# Altium PCB BMSPowerDistribution.PcbDoc (part 5 of 6)
Units mil, origin at the board's own origin, x right, y up, seen from the top; angles counter-clockwise.
Board outline 5328.74 x 5315 mil, 4 copper layers (Top Layer, Layer 1, Layer 2, Bottom Layer), stack 24.6 mil thick; 321 components, 209 nets, 1075 pads, 489 vias.
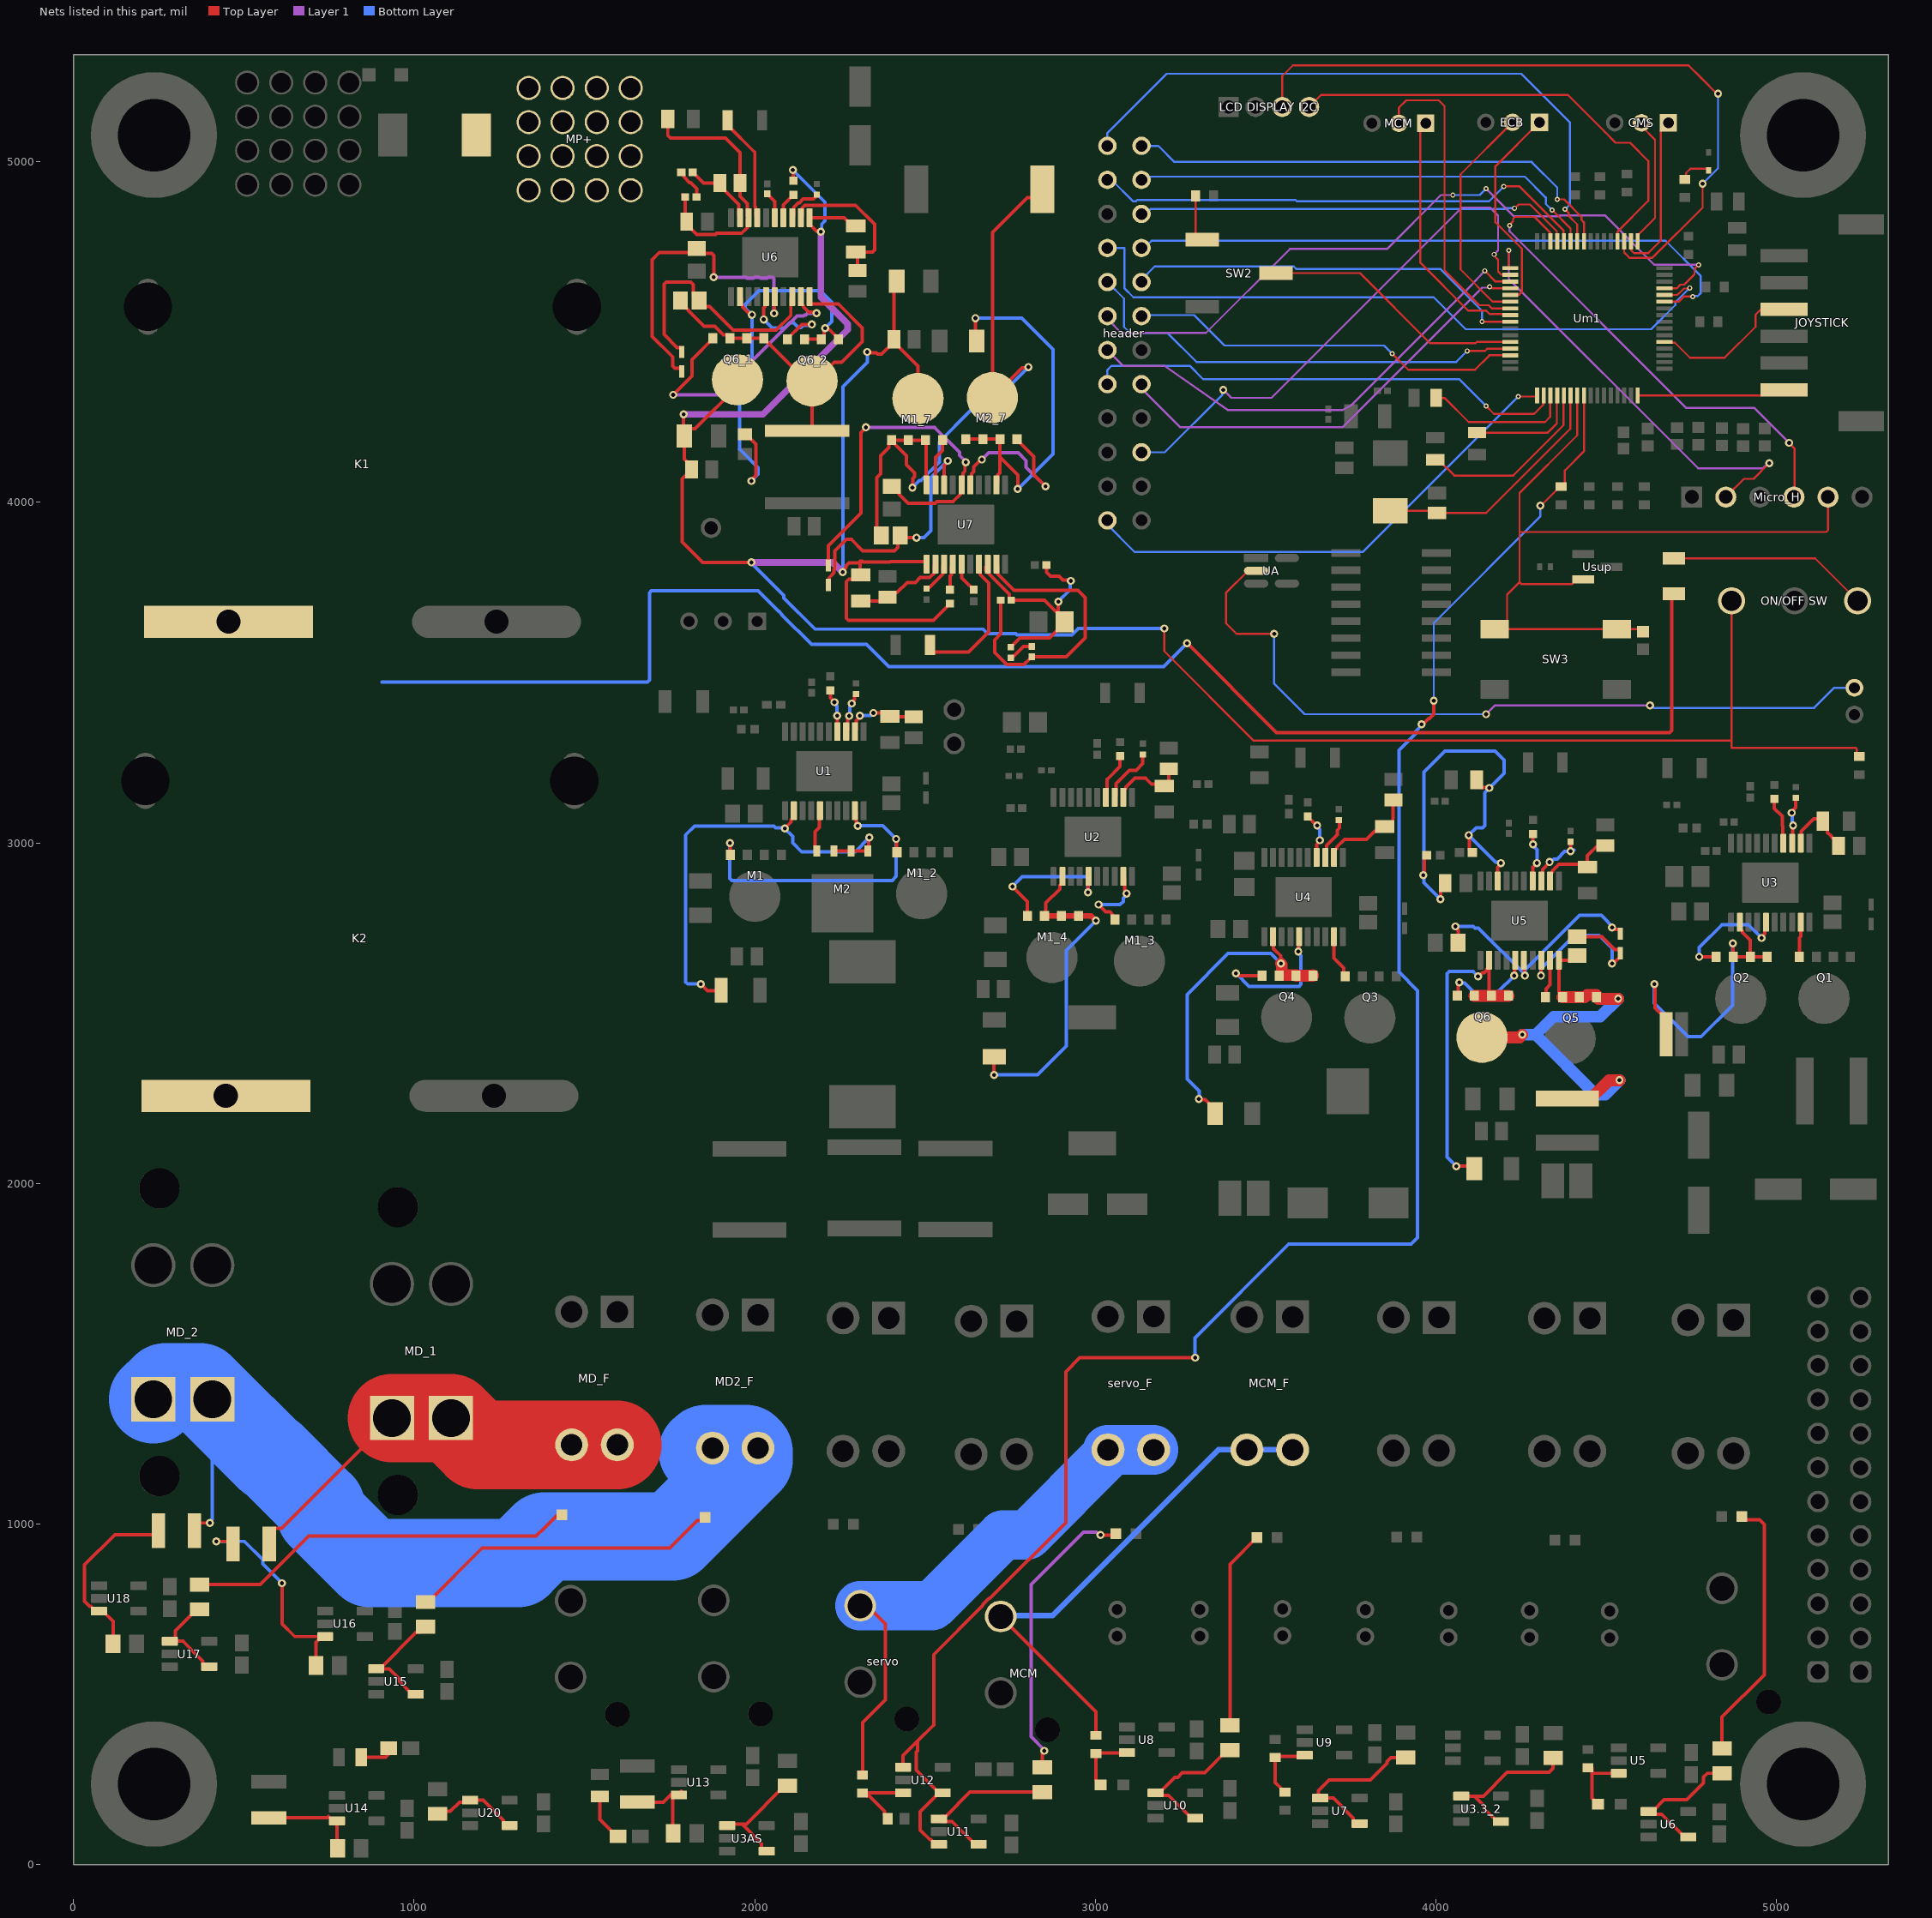
[diagram p6: the nets of this part, all layers, seen from the top]

## Via types
v1: diameter 23.62, hole 11.81, Top Layer to Bottom Layer, 370 vias
v2: diameter 19.68, hole 7.87, Top Layer to Bottom Layer, 84 vias
v3: diameter 15, hole 8, Top Layer to Bottom Layer, 35 vias

## Nets (pads, with @x,y where several pads share a name; then routed paths per layer and width w, separated by ;. In a path a pad name is that pad's centre, name@x,y a point inside that pad or via, vN(x,y) a via of type N, cw(c..) or ccw(c..) an arc to the next point about the centre after c; other vN are vias at no path point) (continued)
NetC83_1: C83.1 R56.1 R58.1 R59.2 U5.8 | length 1348.3
  Top Layer w10: v1(3963.4,2905) 3966.01,2907.61 3966.01,2959.06 R56.1@3970.47,2963.52 ; v1(4013.78,2834.65) 4013.86,2834.72 4013.86,2868.19 R58.1@4027.56,2881.89 ; v1(4096.39,3022.83) 4099,3020.22 4099,2980.68 4107.24,2972.44 C83.1@4107.42,2972.44 ; R59.2@4120.25,3185.04 4120.25,3176.54 4134.25,3162.54 4156.43,3162.54 v1(4157.55,3161.42) ; U5.8@4182.13,2888.01 4182.13,2928.79 4190.94,2937.61 v1(4190.94,2940.94)
  Bottom Layer w10: v1@3962.72,2905 3965.32,2907.61 3965.32,2931.29 3965.74,2931.71 3965.74,3208.02 4027.4,3269.68 4174.21,3269.68 4200.79,3243.11 4200.79,3204.66 v1(4157.55,3161.42) 4143.7,3147.57 4143.7,3051.18 4137.28,3044.76 4118.32,3044.76 v1(4096.39,3022.83) 4175.67,2943.55 4188.34,2943.55 v1(4190.94,2940.94) ; v1(3963.4,2905) 3965.32,2903.08 3965.32,2883.1 v1(4013.78,2834.65)
NetC84_2: C84.2 D5.2 U5.16 | length 759.4
  Top Layer w10: v1(4058.07,2754.92) 4058.07,2751.24 4065.5,2743.81 C84.2@4065.5,2706.5 ; U5.16@4258.9,2655.72 4260.35,2654.27 4260.35,2611.69 v1(4261.81,2610.24) ; v1(4517.72,2751.97) 4521.4,2751.97 4527.17,2746.2 4538.65,2746.2 4541.34,2743.51 D5.2@4541.34,2733.27
  Bottom Layer w10: v1(4058.07,2754.92) 4110.54,2754.92 4115.32,2750.15 4125.32,2750.15 v1@4261.81,2613.65 ; v1(4261.81,2610.24) v1@4261.81,2613.65 ; v1@4524.28,2749.09 4485.97,2787.4 4422.24,2787.4 4262.4,2627.56 4262.4,2614.24 v1@4261.81,2613.65
NetC85_1: C85.1 L1_5.1 Q5.1 Q5.2 Q5.3 Q6.5-6-7-8 U5.20 | length 1300.4
  Top Layer w10: Q5.3@4372.05,2547.24 4372.05,2548.72 4361.26,2559.51 U5.20@4361.26,2655.72 4401.79,2655.72 C85.1@4415.35,2669.29 ; L1_5.1@4386.16,2249.65 L1_5.1@4387.78,2248.03
  Top Layer w34.65: Q6.5-6-7-8@4135.63,2429.04 4245.97,2429.04 v1(4253.94,2437.01) ; Q5.3@4372.05,2547.24 Q5.2@4422.05,2547.24 4437.28,2547.24 4444.04,2554 Q5.1@4472.05,2554 ; L1_5.1@4387.78,2248.03 4453.83,2248.03 4508.94,2303.15 v1(4539.37,2303.15) ; Q5.1@4472.05,2547.24 4476.97,2542.32 v1(4535.43,2542.32)
  Bottom Layer w34.65: v1(4253.94,2437.01) 4293.31,2437.01 ; v1(4535.43,2542.32) 4482.78,2489.67 4345.96,2489.67 4293.31,2437.01 ; v1(4539.37,2303.15) 4497.62,2261.4 4468.92,2261.4 4293.31,2437.01
NetC85_2: C85.2 D5.1 U5.18 | length 580.8
  Top Layer w10: v1(4309.06,2610.24) 4309.57,2610.75 4309.57,2655.21 U5.18@4310.08,2655.72 ; C85.2@4415.35,2724.41 4487.99,2724.41 4525.36,2687.04 4538.65,2687.04 4543.67,2682.01 D5.1@4543.67,2668.72 ; v1(4517.72,2645.67) 4517.72,2652.56 4527.96,2652.56 4541.34,2665.94 D5.1@4541.34,2676.18
  Bottom Layer w10: v1(4309.06,2610.24) 4309.06,2629.92 4407.48,2728.35 4479.51,2728.35 4517.72,2690.14 v1(4517.72,2645.67)
NetCb71_1: Cb71.1 L1_7.2 M1_7.1 M1_7.2 M1_7.3 M2_7.5-6-7-8 U7.20 | length 2066.9
  Top Layer w10: Cb71.1@2372.05,3902.56 2358.75,3915.86 2358.75,4073.32 2369.64,4084.21 2369.64,4137.51 2393.77,4161.64 2393.77,4175.08 M1_7.1@2401.68,4182.99 ; v1(2463.24,4043.22) 2464.49,4044.47 2464.49,4070.03 2469.49,4075.03 2469.49,4086.36 2445.5,4110.35 2445.5,4137.69 2401.68,4181.51 M1_7.1@2401.68,4182.99 ; U7.20@2505.23,4051.18 2503.46,4052.95 2503.46,4181.22 M1_7.3@2501.68,4182.99 M1_7.2@2451.68,4182.99 M1_7.1@2401.68,4182.99 ; v1(2804.06,4397.64) 2801.45,4395.03 2785.32,4395.03 M2_7.5-6-7-8@2698.2,4307.91 2698.2,4793.16 2800.31,4895.27 2820.42,4895.27 L1_7.2@2844.45,4919.29
  Bottom Layer w10: v1(2463.24,4043.22) 2483.63,4063.62 2487.83,4063.62 2542.28,4118.07 2542.28,4178.11 2633.13,4268.96 2692.19,4268.96 2746.82,4323.59 2746.82,4340.4 v1(2804.06,4397.64)
NetCb71_2: Cb71.2 D7.1 U7.18 | length 739.9
  Top Layer w10: D7.1@2216.44,3757.59 2219.13,3760.28 2219.13,3779.01 2233.13,3793.01 2233.13,3803.18 2235.76,3805.8 2235.76,3858.05 2269.42,3891.72 2283.86,3891.72 2317.31,3858.27 2410.41,3858.27 2420.44,3868.3 Cb71.2@2420.44,3879.05 ; Cb71.2@2427.17,3907.48 2438.11,3896.54 v1(2475.23,3896.54) ; U7.18@2556.41,4051.18 2556.93,4051.69 2556.93,4108.32 2566.96,4118.36 v1(2566.96,4122.05)
  Bottom Layer w10: v1(2475.23,3896.54) 2496.93,3896.54 2517.73,3917.34 2517.73,4072.82 v1(2566.96,4122.05)
NetCb_1: Cb.1 L6.1 Q6_1.1 Q6_1.2 Q6_1.3 Q6_2.5-6-7-8 U6.20 | length 1082
  Top Layer w10: Cb.1@1781.88,4593.13 1781.88,4588.21 1806.35,4563.75 1806.35,4562.83 1851.66,4517.51 1882.74,4517.51 1908.21,4492.04 1918.91,4492.04 1927.2,4483.75 Q6_1.3@1927.2,4482.28 Q6_1.2@1977.2,4482.28 Q6_1.1@2027.2,4482.28 2027.2,4480.8 2150.87,4357.13 Q6_2.5-6-7-8@2168.44,4357.13 ; L6.1@2154.44,4209.73 2155.72,4209.73 2168.44,4222.45 Q6_2.5-6-7-8@2168.44,4357.13 ; U6.20@2161.35,4604.08 2161.35,4587.33 2165.21,4583.47 2245.27,4583.47 2316.1,4512.64 2316.1,4471.61 2255.91,4411.42 2233.45,4411.42 2179.16,4357.13 Q6_2.5-6-7-8@2168.44,4357.13
NetCb_2: Cb.2 D6.1 U6.18 | length 751
  Top Layer w10: D6.1@1785.43,4441.93 1785.43,4452.17 1782.74,4454.87 1772.5,4454.87 1734.37,4493 1734.37,4640.87 1740.22,4646.73 1812.84,4646.73 1820.35,4639.23 1820.35,4609.79 Cb.2@1837,4593.13 1837,4592.43 1853.65,4575.78 1867.8,4575.78 1937.53,4506.04 1993.04,4506.04 1993.34,4505.75 2009.89,4505.75 2010.18,4506.04 2063.13,4506.04 2106.31,4549.23 2106.31,4600.22 U6.18@2110.17,4604.08
NetCbp2_1: Cbp2.1 RJ7.2 | length 87.6
  Top Layer w10: RJ7.2@844.49,314.96 915.35,314.96 Cbp2.1@927.17,326.77
NetCbp_1: Cbp.1 RJ6.2 | length 142.3
  Top Layer w10: RJ6.2@1545.28,199.8 1545.28,132.01 1594.6,82.68 Cbp.1@1599.39,82.68
NetCc6_1: Cc6.1 Rc.1 Rf.1 Rfb.2 U6.8 | length 803.4
  Top Layer w10: Rfb.2@1744.98,5125.98 1744.98,5078.24 1753.34,5069.88 1914.37,5069.88 1957.04,5027.21 Cc6.1@1957.04,4937.85 1957.04,4898.51 1978.36,4877.19 1978.36,4840.22 U6.8@1982.22,4836.37 1978.36,4832.51 1978.36,4807.18 1961.53,4790.34 1887.92,4790.34 1884.79,4787.22 1830.25,4787.22 1800.49,4816.98 Rf.1@1800.49,4824.85 1796.05,4829.3 Rc.1@1796.05,4896.85 1795.06,4896.85 1789.24,4902.68 Rc.1@1789.24,4903.67
NetCc6_2: Cc6.2 Cc_6.2 U6.9 | length 218.3
  Top Layer w10: Cc_6.2@1818.26,4968.85 1819.1,4968.85 1850.1,4937.85 Cc6.2@1897.98,4937.85 1897.98,4929.98 1952.77,4875.19 1952.77,4840.22 U6.9@1956.63,4836.37
NetCc7_1: Cc7.1 Cc72.2 U7.9 | length 908.5
  Top Layer w10: U7.9@2709.96,3818.89 2713.81,3815.04 2713.81,3789.7 2761.47,3742.05 2948.9,3742.05 2970.47,3720.47 2970.47,3602.36 2915.26,3547.15 Cc72.2@2813.97,3547.15 2813.97,3546.31 2809.67,3542.01 2808.82,3542.01 2790.66,3523.84 2740.1,3523.84 2704.44,3559.51 2704.44,3596.17 2722.64,3614.37 Cc7.1@2722.64,3712.4
NetCc7_2: Cc7.2 Rb7.2 Rc7.1 Rf7.2 U7.8 | length 727
  Top Layer w10: U7.8@2678.7,3811.02 2678.7,3799.23 2747.52,3730.41 2747.52,3717.83 2752.76,3712.6 Cc7.2@2753.54,3712.6 2851.38,3712.6 2875.18,3688.8 2910.43,3653.54 Rb7.2@2910.43,3649.61 2910.43,3645.67 2866.36,3601.6 2778.76,3601.6 Rc7.1@2751.97,3574.89 Rc7.1@2751.97,3574.89 ; Rf7.2@2856.3,3816.46 2857.14,3815.61 2857.14,3794.44 2868.11,3783.46 2893.7,3783.46 2904.87,3772.29 2925.54,3772.29 v1(2928.15,3769.68) ; Rb7.2@2891.73,3668.31 v1(2891.73,3708.66)
  Bottom Layer w10: v1(2891.73,3708.66) 2925.94,3742.87 2925.94,3767.48 v1(2928.15,3769.68)
NetCc72_1: Cc72.1 Rc7.2 | length 76
  Top Layer w10: Rc7.2@2751.97,3543.22 2756.18,3547.44 2760.15,3547.44 2789.67,3576.96 Cc72.1@2813.97,3576.96
NetCc_6_1: Cc_6.1 Rc.2 | length 92.9
  Top Layer w10: Cc_6.1@1784.51,4968.85 1785.36,4968.85 1791.62,4962.59 1791.62,4956.46 1809.09,4938.99 1812.04,4938.99 1829.51,4921.52 Rc.2@1829.51,4896.85
NetCi6_1: "ON/OFF SW.1" Ci6.1 Ci7.1 Cx6.1 Cx7.1 M1_7.5-6-7-8 Q6_1.5-6-7-8 Re7.1 Ren.1 RSW.2 RU1.1 Ru7.1 U6.1@2161.35,4836.37 U7.1@2505.23,3818.89 | length 8408.3
  Top Layer w6: v1(3202.76,3629.92) 3202.76,3562.99 3465.55,3300.2 4868.68,3300.2 ; 4868.68,3710.98 4868.68,3300.2 ; RSW.2@5236.3,3249.53 5236.3,3276.01 5232.78,3279.53 4868.68,3279.53 4868.68,3300.2
  Top Layer w10: v1(1791.34,4258.86) 1791.34,4197.01 Ci6.1@1793.21,4195.13 1793.21,4126.71 1814.91,4105.01 Cx6.1@1814.91,4097.13 1786.95,4069.17 1786.95,3884.31 1847.36,3823.9 v1(1990.16,3823.9) ; Ci6.1@1793.21,4198.42 1810.94,4216.15 1825.08,4216.15 1949.44,4340.5 Q6_1.5-6-7-8@1949.44,4360.13 ; v1(2112.2,4976.38) 2112.86,4975.72 2112.86,4945.18 Ren.1@2113.51,4944.52 ; v1(2194.37,4794.76) 2191.76,4797.37 2181.65,4797.37 2161.35,4817.67 U6.1@2161.35,4836.37 2263.04,4836.37 2287.4,4812.01 RU1.1@2297.24,4812.01 ; v1(2258.86,3795.28) 2258.86,3798.96 2267.9,3808 2267.9,3813.75 2276.63,3822.49 2298.71,3822.49 2299.06,3822.83 2309.06,3822.83 2309.06,3789.9 Ru7.1@2311.44,3787.52 2298.19,3774.27 2276.24,3774.27 2269.69,3767.72 2269.69,3659.4 2275.54,3653.54 2524.38,3653.54 Re7.1@2573.72,3702.89 ; 2309.06,3827.74 2315.71,3827.74 2318.89,3824.56 2396.5,3824.56 2398.72,3826.77 2501.37,3826.77 2505.23,3822.91 U7.1@2505.23,3818.89 ; v1(2330.71,4441.93) 2333.32,4439.32 2357,4439.32 2360.85,4435.47 2373.13,4435.47 Cx7.1@2408.91,4471.26 ; Cx7.1@2408.03,4472.15 Cx7.1@2408.91,4471.26 ; Ci7.1@2408.91,4625.98 Cx7.1@2408.91,4479.13 Cx7.1@2408.91,4471.26 ; M1_7.5-6-7-8@2479.44,4305.13 2479.44,4400.73 Cx7.1@2408.91,4471.26
  Layer 1 w19.68: v1(1791.34,4258.86) 2024.61,4258.86 2273.34,4507.59 2273.34,4523.9 2194.37,4602.87 v1(2194.37,4794.76) ; v1(1990.16,3823.9) 2229.17,3823.9 2257.79,3795.28 v1(2258.86,3795.28)
  Bottom Layer w10: v1(1990.16,3823.9) 1990.16,3822.83 2085.95,3727.04 2085.95,3719.17 2177.17,3627.95 2671.26,3627.95 2683.98,3615.24 2766.15,3615.24 2770.24,3611.14 2931.28,3611.14 2950.05,3629.92 v1(3202.76,3629.92) ; v1(2112.2,4976.38) 2206.69,4881.89 2206.69,4826.57 2196.98,4816.86 2196.98,4797.37 v1(2194.37,4794.76) ; v1(2258.86,3795.28) 2258.86,4339.57 2330.71,4411.42 v1(2330.71,4441.93)
NetCr7_1: Cr7.1 U7.5@2607.59,3818.89 | length 90.2
  Top Layer w10: U7.5@2607.59,3818.89 2607.59,3778.89 2621.47,3765.02 2622.31,3765.02 2642.72,3744.61 Cr7.1@2642.72,3743.76
NetCr_1: Cr.1 U6.5@2058.99,4836.37 | length 78.5
  Top Layer w10: Cr.1@2037.51,4905.95 2037.51,4905.11 2058.99,4883.63 U6.5@2058.99,4836.37
NetCs7_2: Cs7.2 U7.7 | length 421.7
  Top Layer w10: Cs7.2@2515.07,3581.69 2515.07,3571.02 2525.07,3561.02 2627.95,3561.02 2687.01,3620.08 2687.01,3763.78 2662.63,3788.15 2662.63,3815.04 U7.7@2658.77,3818.89
NetCs_2: Cs.2 U6.7 | length 321.7
  Top Layer w10: Cs.2@1920.96,5122.05 1920.96,5107.55 2000.51,5027.99 2000.51,4869 2002.14,4867.37 2002.14,4864.78 2003.95,4862.97 2003.95,4840.22 U6.7@2007.81,4836.37
NetCv7_2: Cv7.2 D7.2 U7.16 | length 1125.3
  Top Layer w10: D7.2@2216.44,3814.68 2216.44,3872.53 2312.01,3968.1 2312.01,4205.71 v1(2326.77,4220.47) ; Cv7.2@2400.44,4031.47 2422.83,4031.47 2424.06,4030.24 2424.06,4024.39 2450.42,3998.03 2529.96,3998.03 2535.02,4003.09 2582.43,4003.09 2603.74,4024.39 2603.74,4047.32 2611.45,4055.04 2611.45,4085.8 2617.47,4091.82 2617.47,4115.5 v1(2620.08,4118.11)
  Layer 1 w10: v1(2326.77,4220.47) 2528.12,4220.47 2601.86,4146.73 2601.86,4137.81 2620.08,4119.59 v1(2620.08,4118.11)
NetCv_2: Cv.2 D6.2 U6.16 | length 977.1
  Top Layer w10: D6.2@1785.43,4384.84 1785.43,4391.02 1782.74,4393.72 1766.12,4393.72 1759.64,4400.2 1759.64,4427.37 1699.44,4487.57 1699.44,4713.13 1719.84,4733.54 1817.5,4733.54 Cv.2@1830.44,4746.47 1845.44,4731.47 1874.06,4731.47 1879.92,4725.61 v1(1879.92,4661.42) ; v1(2057.09,4555.12) 2058.04,4556.07 2058.04,4603.13 U6.16@2058.99,4604.08
  Layer 1 w10: v1(1879.92,4661.42) 1974.45,4661.42 1977.73,4658.14 1996.55,4658.14 1999.83,4661.42 2013.82,4661.42 2017.1,4658.14 2035.92,4658.14 2039.2,4661.42 2053.19,4661.42 2057.09,4657.52 v1(2057.09,4555.12)
NetD11_2: D11.2 R10.2 | length 93.6
  Top Layer w6: R10.2@4726.38,4948.82 4735.05,4957.5 4735.05,4967.34 4748.03,4980.31 D11.2@4801.18,4980.31
NetFans_L_2: F_L.2 RL3.2 | length 785.2
  Top Layer w10: RL3.2@4840.55,340.55 4840.55,433.07 4964.57,557.09 4964.57,999.02 4950.79,1012.8 4907.48,1012.8 F_L.2@4898.62,1021.65
NetLabel30: header.1 Um1.41 | length 1473.8
  Top Layer w6: v3(4356.62,4890.07) 4376.5,4890.07 4427.79,4838.79 4427.79,4829.91 4435.19,4822.52 Um1.41@4435.19,4766.76
  Bottom Layer w6: header.1@3135.83,5047.24 3185.43,5047.24 3232.68,5000 4281.5,5000 4356.62,4924.88 v3(4356.62,4890.07)
NetLabel31: header.2 Um1.42 | length 1898.5
  Top Layer w6: v3(4379.08,4861.51) 4379.08,4861.2 4390.6,4849.69 4390.6,4845.44 4390.78,4845.26 4390.78,4841.08 4415.5,4816.35 Um1.42@4415.5,4766.76
  Bottom Layer w6: header.2@3035.83,5047.24 3035.83,5085.04 3209.79,5259 4251.19,5259 4393.65,5116.54 4393.65,4874.52 4380.65,4861.51 v3(4379.08,4861.51)
NetLabel32: header.3 Um1.43 | length 1375.8
  Top Layer w6: v3(4341.54,4858.27) 4342.31,4858.27 4395.82,4804.75 Um1.43@4395.82,4766.76
  Bottom Layer w6: header.3@3135.83,4947.24 3148.82,4947.24 3158,4956.43 3163.08,4956.43 3163.34,4956.69 4261.81,4956.69 4323.08,4895.42 4323.08,4876.72 v3(4341.54,4858.27)
NetLabel36: header.7 Um1.27 | length 1861.2
  Top Layer w6: Um1.27@4671.41,4589.59 4712.75,4589.59 4727.81,4604.65 v3(4754.25,4604.65)
  Bottom Layer w6: header.7@3135.83,4747.24 3143.92,4747.24 3165.33,4768.65 4674.85,4768.65 4777.56,4665.94 4777.56,4614.17 4769.76,4606.37 4755.97,4606.37 v3(4754.25,4604.65)
NetLabel37: header.8 Um1.28 | length 2016.3
  Top Layer w6: Um1.28@4671.41,4609.28 4708.62,4609.28 4713.08,4613.74 4714.19,4613.74 4728.65,4628.2 4744.34,4628.2 v3(4746.06,4629.92)
  Bottom Layer w6: header.8@3035.83,4747.24 3085.43,4747.24 3086.09,4746.59 3086.09,4628.48 3112.2,4602.36 3994.09,4602.36 4087.83,4508.62 4632.64,4508.62 4703.8,4579.78 4703.8,4587.65 v3(4746.06,4629.92)
NetLabel38: header.9 Um1.57 | length 1183.2
  Top Layer w6: v3(4135.83,4531.5) 4136.31,4531.02 4218.17,4531.02 Um1.57@4218.65,4530.54
  Bottom Layer w6: header.9@3136.89,4655.04 3174.76,4692.91 3583,4692.91 3590.12,4685.79 4013.03,4685.79 4135.83,4562.99 v3(4135.83,4531.5)
NetLabel40: header.10 Um1.61 | length 1358.8
  Top Layer w6: v3(4092.52,4444.88) 4144.72,4444.88 4151.64,4451.8 Um1.61@4218.65,4451.8
  Bottom Layer w6: header.10@3021.65,4665.35 header.10@3035.83,4665.35 ; header.10@3035.83,4647.24 3084.65,4598.43 3084.65,4515.75 3102.73,4497.67 3212.3,4497.67 3297.32,4412.64 4060.28,4412.64 v3(4092.52,4444.88)
NetLabel41: header.11 Um1.62 | length 1166.5
  Top Layer w6: v3(3872.05,4437.01) 3919.29,4389.76 4115.21,4389.76 4157.55,4432.11 Um1.62@4218.65,4432.11
  Bottom Layer w6: header.11@3136.07,4550.1 3290.45,4550.1 3379.92,4460.63 3848.43,4460.63 v3(3872.05,4437.01)
NetLabel42: header.12 Um1.29 | length 2170.4
  Top Layer w6: Um1.29@4671.41,4628.96 4707.79,4628.96 4718.48,4639.65 4729.8,4639.65 4759.66,4669.51 4759.66,4685.84 v3(4771.65,4697.83)
  Layer 1 w6: header.12@3035.83,4547.24 3035.83,4538.79 3076.95,4497.66 3155.22,4497.66 3155.27,4497.71 3325.07,4497.71 3571.76,4744.41 3856.61,4744.41 4014.76,4902.56 v3(4050.2,4902.56) ; v3(4147.64,4921.26) 4148,4921.26 4229.37,4839.89 4361.45,4839.89 4364.69,4843.14 4496.77,4843.14 4642.07,4697.83 v3(4771.65,4697.83)
  Bottom Layer w6: v3(4050.2,4902.56) 4128.94,4902.56 v3(4147.64,4921.26)
NetLabel44: header.14 Um1.51 | length 1423.9
  Top Layer w6: v3(4143.7,4680.35) 4175.41,4648.65 Um1.51@4218.65,4648.65
  Layer 1 w6: header.14@3035.83,4447.24 3081.74,4401.33 3201.18,4401.33 3203.07,4401.33 3388.5,4271.65 3726.94,4271.65 3752.57,4286.04 4098.62,4632.08 v3(4143.7,4680.35)
NetLabel45: header.15 Um1.52 | length 1315.6
  Top Layer w6: v3(4158.27,4633.43) 4161.96,4633.43 4166.43,4628.96 Um1.52@4218.65,4628.96
  Layer 1 w6: header.15@3135.83,4347.24 3135.83,4334.65 3250,4220.47 3726.38,4220.47 4136.73,4630.83 4155.67,4630.83 v3(4158.27,4633.43)
NetLabel46: header.16 Um1.2 | length 1424.1
  Top Layer w6: v3(4147.64,4283.46) 4171.26,4259.84 4288.38,4259.84 4316.08,4287.54 4316.08,4313 Um1.2@4317.08,4314
  Bottom Layer w6: header.16@3035.83,4347.24 3035.83,4388.98 3048.18,4401.33 3277.8,4401.33 3317.57,4361.56 4069.54,4361.56 v3(4147.64,4283.46)
NetLabel47: RJ3.2 Um1.3 | length 433.5
  Top Layer w6: RJ3.2@4001.04,4307 4025.84,4307 4096.62,4236.22 4320.87,4236.22 4335.76,4251.12 4335.76,4313 Um1.3@4336.76,4314
NetLabel48: RJ4.2 Um1.4 | length 327.8
  Top Layer w6: RJ4.2@4121.56,4204.96 4328.98,4204.96 4355.45,4231.43 4355.45,4313 Um1.4@4356.45,4314
NetLabel60: header.24 Um1.1 | length 1495.3
  Top Layer w6: v3(4242.13,4311.02) 4296.39,4311.02 4297.39,4312.02 Um1.1@4297.39,4314
  Bottom Layer w6: header.24@3029.53,3940.94 3116.14,3854.33 3785.43,3854.33 v3(4242.13,4311.02)
NetLabel61: MCM.2@3891.56,5113.33 Um1.55 | length 913.4
  Top Layer w6: MCM.2@3891.56,5118 3891.56,5159.22 3913.34,5181 4008.56,5181 4025.56,5164 4025.56,4681 4127.5,4579.06 4155.14,4579.06 4164.29,4569.91 Um1.55@4218.65,4569.91
NetLabel62: MCM.1@3970.3,5113.33 Um1.56 | length 743.5
  Top Layer w6: MCM.1@3970.3,5113.33 3954.72,5097.76 3954.72,4703.83 4095.57,4562.99 4148.49,4562.99 4158.64,4552.84 4194.3,4552.84 4195.92,4551.22 4217.65,4551.22 Um1.56@4218.65,4550.22
NetLabel63: CMS.2 Um1.33 | length 385.7
  Top Layer w6: Um1.33@4592.67,4766.76 4592.67,4784.26 4643.7,4835.29 4643.7,5065.27 4604.3,5104.67 CMS.2@4604.3,5115
NetLabel64: CMS.1 Um1.34 | length 487.5
  Top Layer w6: Um1.34@4572.98,4766.76 4573.98,4765.76 4573.98,4740.3 4582.09,4732.19 4623.92,4732.19 4660.76,4769.03 4660.76,5092.72 CMS.1@4683.04,5115
NetLabel65: ECB.1 Um1.53 | length 622.1
  Top Layer w6: Um1.53@4218.65,4609.28 4219.65,4610.28 4245.11,4610.28 4253.22,4618.38 4253.22,4744.81 4175.2,4822.83 4175.2,4987.24 ECB.1@4304.3,5116.35
NetLabel66: ECB.2 Um1.54 | length 680.5
  Top Layer w6: Um1.54@4218.65,4589.59 4167.33,4589.59 4072.83,4684.08 4072.83,4963.62 ECB.2@4225.56,5116.35
NetLabel72: header.4 Um1.44 | length 1472.4
  Top Layer w6: v3(4199.8,4928.15) 4245.67,4928.15 4374.56,4799.26 4374.56,4768.33 Um1.44@4376.13,4766.76
  Bottom Layer w6: header.4@3035.83,4947.24 3048.08,4947.24 3110.48,4884.84 3119.42,4884.84 3122.84,4888.27 3588.28,4888.27 3592.37,4884.19 4155.84,4884.19 v3(4199.8,4928.15)
NetLabel73: header.5 Um1.45 | length 1293.9
  Top Layer w6: v3(4231.3,4864.17) 4232.91,4864.17 4243.77,4875.03 4276.66,4875.03 4355.45,4796.25 4355.45,4767.76 Um1.45@4356.45,4766.76
  Bottom Layer w6: header.5@3135.83,4847.24 3148.38,4847.24 3163.34,4862.2 4192.16,4862.2 4204.04,4861.64 4206.67,4861.64 4209.2,4864.17 v3(4231.3,4864.17)
NetLabel74: header.19 Um1.50 | length 1594.9
  Top Layer w6: v3(4171.26,4728.35) 4171.26,4724.66 4183.03,4712.89 4183.03,4678.49 4192.19,4669.33 4217.65,4669.33 Um1.50@4218.65,4668.33
  Layer 1 w6: v1(3375.98,4330.71) 3399.61,4307.09 3517.72,4307.09 4076.77,4866.14 4159.45,4866.14 4183.07,4842.52 4183.07,4740.16 v3(4171.26,4728.35)
  Bottom Layer w6: header.19@3135.83,4147.24 3204.33,4147.24 3373.17,4316.09 3373.17,4327.9 v1(3375.98,4330.71)
"NetLCD DISPLAY I2C_3": "LCD DISPLAY I2C.3" Um1.35 | length 2099.2
  Top Layer w6: 3549.21,5161.42 3549.21,5251.97 3580.71,5283.46 4742.22,5283.46 4779.58,5246.11 4779.58,5246.02 v1@4828.74,5196.85 ; Um1.35@4553.3,4766.76 4553.3,4734.3 4564.91,4722.69 4564.91,4722.2 4568.42,4718.68 4636.4,4718.68 4783.46,4865.75 v1(4783.46,4936.02)
  Bottom Layer w6: v1(4783.46,4936.02) 4828.74,4981.3 v1@4828.74,5196.85
  other v1: 4828.74,5200.54
"NetLCD DISPLAY I2C_4": "LCD DISPLAY I2C.4" Um1.36 | length 1364.9
  Top Layer w6: 3627.95,5161.42 3663.6,5197.06 4387.58,5197.06 4495.85,5088.79 4495.85,5088.68 4528.38,5056.15 4570.82,5056.15 4624.02,5002.95 4624.02,4885.83 4533.93,4795.74 4533.93,4767.07 Um1.36@4533.61,4766.76
NetM1_2_4: M1.4 M1_2.4 U1.19 | length 962.6
  Top Layer w10: v1(1927.17,3000) 1927.82,2999.34 1927.82,2965.8 M1.4@1928.48,2965.14 ; U1.19@2294.28,3094.86 2298.14,3091 2298.14,3058.34 2302.46,3054.02 v1(2302.46,3050.33) ; v1(2415.35,3011.81) 2416.64,3010.53 2416.64,2973.82 M1_2.4@2417.92,2972.54
  Bottom Layer w10: v1(1927.17,3000) 1927.17,2895.62 1933.02,2889.76 2403.54,2889.76 2415.35,2901.57 v1(2415.35,3011.81) 2376.83,3050.33 v1(2302.46,3050.33)
NetM1_3_4: M1_3.4 U2.19 | length 213.3
  Top Layer w10: v1(3009.84,2818.9) 3031.48,2797.26 3043.49,2797.26 3051.77,2788.97 M1_3.4@3051.77,2787.5 ; U2.19@3082.72,2901.72 3086.57,2897.86 3086.57,2860.55 3091.9,2855.22 v1(3091.9,2851.54)
  Bottom Layer w10: v1(3009.84,2818.9) 3072.83,2818.9 3082.22,2828.29 3082.22,2838.17 3091.9,2847.85 v1(3091.9,2851.54)
NetM1_4_1: M1_4.1 M1_4.2 M1_4.3 R17.1 U2.12 | length 999.5
  Top Layer w10: v1(2702.76,2318.9) 2702.76,2370.67 R17.1@2703.72,2371.63 ; M1_4.3@2850.98,2785.53 2855.14,2789.68 2855.14,2823.64 2895.85,2864.35 2895.85,2875.28 2903.58,2883.02 U2.12@2903.58,2901.72
  Top Layer w16.14: M1_4.3@2850.98,2785.53 M1_4.2@2900.98,2785.53 2988.09,2785.53 v1(3001.97,2771.65)
  Bottom Layer w10: v1(2702.76,2318.9) 2830.76,2318.9 2915.06,2403.2 2915.06,2684.74 v1(3001.97,2771.65)
NetM1_4_4: M1_4.4 U2.15 | length 428.7
  Top Layer w10: v1(2756.89,2872.05) 2800.98,2827.95 M1_4.4@2800.98,2785.53 ; v1(2978.66,2854.85) 2979.51,2855.69 2979.51,2900.87 U2.15@2980.35,2901.72
  Bottom Layer w10: v1(2756.89,2872.05) 2785.71,2900.87 2972.81,2900.87 2978.66,2895.01 v1(2978.66,2854.85)
NetM1_7_4: M1_7.4 U7.19 | length 140.5
  Top Layer w10: U7.19@2530.82,4051.18 2530.82,4131.75 2551.68,4152.6 M1_7.4@2551.68,4182.99
NetM2_1: M2.1 M2.2 M2.3 R6.2 U1.12 | length 1363
  Top Layer w10: v1(1842.14,2585.73) 1861.56,2566.31 1901.04,2566.31 R6.2@1901.66,2566.93 ; v1(2088.58,3042.32) 2088.58,3042.57 2107.42,3061.4 2107.42,3068.43 2115.15,3076.16 U1.12@2115.15,3094.86 ; M2.3@2231.59,2977.66 M2.3@2232.87,2976.38 M2.2@2282.87,2976.38 M2.1@2332.87,2976.38 2334.74,2978.25 2334.74,3013.88 v1(2336.61,3015.75)
  Bottom Layer w10: v1(1842.14,2585.73) 1803.1,2585.73 1797.24,2591.59 1797.24,3023.62 1823.47,3049.85 2056.77,3049.85 2061.77,3044.85 2086.06,3044.85 2111.54,3019.37 2111.54,3000.67 2137.8,2974.41 2295.28,2974.41 v1(2336.61,3015.75)
NetM2_4: M2.4 U1.15 | length 126.4
  Top Layer w10: M2.4@2182.87,2976.38 2177.83,2981.42 2177.83,3033.63 2189.46,3045.26 2189.46,3092.4 U1.15@2191.92,3094.86
NetM2_7_1: M2_7.1 M2_7.2 M2_7.3 Rs7.1 U7.12 | length 1140.9
  Top Layer w10: M2_7.1@2620.44,4185.77 M2_7.2@2670.44,4185.77 M2_7.3@2720.44,4185.77 2720.44,4145.67 2720.44,4132.91 ; v1(2648.44,4541.13) 2648.44,4477.32 Rs7.1@2651.62,4474.13 ; U7.12@2709.96,4051.18 2713.81,4055.04 2713.81,4080.37 2720.44,4086.99 2720.44,4132.91 ; v1(2772.64,4039.37) 2772.64,4080.71 2720.44,4132.91
  Bottom Layer w10: v1(2648.44,4541.13) 2784.52,4541.13 2875.98,4449.67 2875.98,4142.72 v1(2772.64,4039.37)
NetM2_7_4: M2_7.4 U7.15 | length 510.6
  Top Layer w10: U7.15@2633.18,4051.18 2637,4054.99 2637,4083.85 2643.7,4090.55 2643.7,4104.71 2664.98,4125.98 v1(2667.32,4125.98) ; M2_7.4@2770.44,4185.77 2770.44,4184.29 2819.88,4134.85 2819.88,4081.69 v1(2854.33,4047.24)
  Layer 1 w10: v1(2667.32,4125.98) 2687.01,4145.67 2773.87,4145.67 2796.87,4122.67 2796.87,4103.72 2853.35,4047.24 v1(2854.33,4047.24)
NetMCM_1: MCM.1@2722.44,728.35 MCM_F.2 R20.1 | length 1525
  Top Layer w10: MCM.1@2722.44,728.35 3001.97,448.82 R20.1@3001.97,379
  Bottom Layer w16.14: MCM.1@2722.44,728.35 2724.64,730.55 2874.48,730.55 3361.65,1217.72 MCM_F.2@3445.79,1217.72 MCM_F.2@3579.65,1217.72
NetMCM_L_2: MCM_L.2 RL4.2 | length 589
  Top Layer w10: RL4.2@3395.67,408.46 3395.67,881.89 MCM_L.2@3477.36,963.58
NetMD2_F_2: MD2_F.2 MD_2.11 MD_2.12 RM3.1 | length 2829.8
  Top Layer w10: RM3.1@352.39,1009.48 358.92,1002.95 v1(400.59,1002.95)
  Bottom Layer w10: MD_2.12@248.34,1363.87 248.34,1352.36 294.21,1306.48 305.72,1306.48 336.61,1275.59 ; v1(400.59,1002.95) 400.59,1006.64 407.48,1013.53 MD_2.11@407.48,1366.14
  Bottom Layer w259.84: MD_2.12@234.25,1366.14 269.69,1401.57 372.05,1401.57 MD_2.11@407.48,1366.14 577.93,1195.69 582.3,1195.69 726.11,1051.89 726.11,1029.24 869.91,885.43 1305.39,885.43 1382.99,963.04 1759.3,963.04 1982.28,1186.02 1982.28,1212.6 1974.41,1220.47 1856.3,1220.47 MD2_F.2@1848.43,1212.6
NetMD_1_11: MD_1.11 MD_1.12 MD_F.2 RM.1 | length 1226
  Top Layer w10: RM.1@574.83,940.94 574.83,972.47 589.61,987.25 611.26,987.25 MD_1.12@935.04,1311.02
  Top Layer w259.84: MD_1.12@935.04,1311.02 MD_1.11@1108.27,1311.02 1187.01,1232.28 MD_F.2@1462.6,1232.28 MD_F.2@1596.46,1232.28
NetMD_L_2: MD2_L.2 RL9.2 | length 924
  Top Layer w10: RL9.2@1033.46,770.67 1041.34,770.67 1199.8,929.13 1750.98,929.13 1831.58,1009.73 1844.37,1009.73 MD2_L.2@1854.33,1019.68
NetMotor_2: MD_L.2 RL8.2 | length 1148.9
  Top Layer w10: RL8.2@369.93,822.02 548.4,822.02 690.94,964.57 1358.27,964.57 1381.3,987.6 1420.28,1026.57 MD_L.2@1434.06,1026.57
"NetON/OFF SW_3": "ON/OFF SW.3" RL.2 | length 591.6
  Top Layer w6: RL.2@4698.82,3835.67 5114.06,3835.67 5238.76,3710.98
NetQ1_4: Q1.4 U3.19 | length 103.5
  Top Layer w10: Q1.4@5067.52,2665.45 5067.52,2721.47 5071.96,2725.91 U3.19@5071.96,2767.15
NetQ2_1: Q2.1 Q2.2 Q2.3 R27.1 U3.12 | length 964.6
  Top Layer w10: v1(4641.73,2585.63) 4644.34,2583.02 4644.34,2516.08 4676.14,2484.27 R27.1@4676.14,2437.99 ; v1(4872.05,2704.72) 4872.74,2704.03 4872.74,2666.14 Q2.3@4873.43,2665.45 Q2.2@4923.43,2665.45 Q2.1@4973.43,2665.45 ; U3.12@4892.82,2767.15 4892.82,2748.45 4900.55,2740.71 4900.55,2737 4923.43,2714.13 Q2.2@4923.43,2663.91
  Bottom Layer w10: v1(4641.73,2585.63) 4641.73,2529.53 4740.53,2430.73 4779.15,2430.73 4872.05,2523.62 v1(4872.05,2704.72)
NetQ2_4: Q2.4 U3.15 | length 356.5
  Top Layer w10: v1(4773.62,2665.35) 4773.67,2665.4 Q2.4@4823.43,2665.45 Q2.4@4823.43,2665.45 ; v1(4956.92,2720.75) 4956.92,2724.44 4965.74,2733.26 4965.74,2763.29 U3.15@4969.59,2767.15
  Bottom Layer w10: v1(4773.62,2665.35) 4773.62,2692.91 4840.8,2760.09 4917.58,2760.09 v1(4956.92,2720.75)
NetQ3_4: Q3.4 U4.19 | length 130.2
  Top Layer w10: U4.19@3701.31,2725 3701.31,2661.15 3730.18,2632.27 3730.18,2612.24 Q3.4@3734.06,2608.37
NetQ4_1: Q4.1 Q4.2 Q4.3 R47.1 U4.12 | length 948.6
  Top Layer w10: v1(3304.35,2248.31) 3306.96,2245.7 3322.71,2245.7 3352.53,2215.88 R47.1@3352.53,2205 ; U4.12@3522.17,2725 3523.17,2724 3523.17,2689.51 3545.28,2667.41 v1(3545.28,2645.67)
  Top Layer w34.65: v1(3545.28,2645.67) 3547.88,2643.06 3547.88,2623.38 3559.55,2611.71 3589.76,2611.71 Q4.2@3591.24,2610.24 ; Q4.2@3589.76,2610.24 Q4.2@3590.27,2610.24 ; Q4.2@3589.76,2610.74 Q4.2@3590.27,2610.24 ; Q4.1@3639.76,2610.24 Q4.1@3639.26,2610.24 ; Q4.2@3590.27,2610.24 Q4.2@3591.24,2610.24 ; Q4.2@3591.24,2610.24 Q4.1@3638.29,2610.24 ; Q4.1@3638.29,2610.24 3639.76,2611.71 3639.76,2610.74 Q4.1@3639.26,2610.24 ; Q4.1@3638.29,2610.24 Q4.1@3639.26,2610.24
  Bottom Layer w10: v1@3305.66,2247 3305.66,2271.11 3269.68,2307.09 3269.68,2555.12 3389.72,2675.15 3515.8,2675.15 v1(3545.28,2645.67)
NetQ4_4: Q4.4 U4.15 | length 433.2
  Top Layer w10: v1(3413.39,2617.13) 3417.07,2617.13 3423.96,2610.24 Q4.4@3489.76,2610.24 ; v1(3596.46,2681.1) 3597.7,2682.35 3597.7,2723.76 U4.15@3598.94,2725
  Bottom Layer w10: v1(3413.39,2617.13) 3451.77,2578.74 3598.47,2578.74 3604.33,2584.6 3604.33,2669.54 3596.46,2677.42 v1(3596.46,2681.1)
NetQ5_4: Q5.4 U5.19 | length 114.1
  Top Layer w10: Q5.4@4322.05,2547.24 4323.78,2548.97 4323.78,2571.15 4335.67,2583.04 U5.19@4335.67,2655.72
NetQ6_1: Q6.1 Q6.2 Q6.3 R57.1 U5.12 | length 985.2
  Top Layer w10: v1(4060.19,2050.55) 4105.9,2050.55 R57.1@4113.14,2043.31 ; v1(4124.04,2608.48) 4126.02,2608.48 4136.7,2619.17 4142.39,2619.17 4148.8,2625.58 4148.8,2629.29 U5.12@4156.54,2637.02 ; U5.12@4156.54,2655.72 U5.12@4156.54,2637.02 ; Q6.2@4163.39,2551.18 4156.54,2558.03 U5.12@4156.54,2637.02
  Top Layer w34.65: Q6.3@4113.39,2551.18 Q6.2@4163.39,2551.18 Q6.1@4213.39,2551.18
  Bottom Layer w10: v1(4060.19,2050.55) 4033.46,2077.28 4033.46,2616.19 4039.32,2622.05 4110.47,2622.05 v1(4124.04,2608.48)
NetQ6_1_4: Q6_1.4 U6.19 | length 814.4
  Top Layer w10: v1(1760.83,4315.94) 1816.17,4371.29 1816.17,4419.77 1877.2,4480.8 Q6_1.4@1877.2,4482.28 ; U6.19@2135.76,4604.08 2135.76,4585.38 2143.5,4577.65 2143.5,4573.94 2158.63,4558.81 2179.4,4558.81 v1(2182.01,4556.2)
  Layer 1 w10: v1(1760.83,4315.94) 1892.72,4315.94 2124.91,4548.13 2143.66,4548.13 2145.96,4550.43 2150.2,4550.43 2155.2,4555.43 2181.24,4555.43 v1(2182.01,4556.2)
NetQ6_2_1: Q6_2.1 Q6_2.2 Q6_2.3 Rs.2 U6.12 | length 1309.6
  Top Layer w10: U6.12@1956.63,4604.08 1960.49,4600.22 1960.49,4581.52 1964.36,4577.65 1964.36,4573.94 1984.51,4553.79 1989.52,4553.79 v1(1992.13,4551.18) ; Rs.2@1971.44,4199.68 1974.39,4199.68 2003.17,4170.9 2003.17,4079.69 1990.16,4066.68 v1(1990.16,4062.99) ; Q6_2.3@2146.2,4479.28 Q6_2.2@2196.2,4479.28 2204.09,4487.16 2204.09,4509.2 v1(2206.69,4511.81) 2209.3,4509.2 2217.75,4509.2 2246.2,4480.75 Q6_2.1@2246.2,4479.28
  Bottom Layer w10: v1(1990.16,4062.99) 2009.84,4082.68 2009.84,4102.36 1956.44,4155.76 1956.44,4346.88 1992.13,4382.57 v1(1992.13,4551.18) 1972.45,4570.86 1972.45,4581.7 2012.8,4622.05 2192.91,4622.05 2226.38,4588.58 2226.38,4531.5 v1(2206.69,4511.81)
NetQ6_2_4: Q6_2.4 U6.15 | length 328.5
  Top Layer w10: v1(2026.57,4537.4) 2026.57,4571.93 2029.54,4574.89 2029.54,4600.22 U6.15@2033.4,4604.08 ; Q6_2.4@2096.2,4479.28 2096.2,4480.75 2138.08,4522.64 v1(2168.31,4522.64)
  Bottom Layer w10: v1(2026.57,4537.4) 2051.84,4512.13 2087.55,4512.13 2102.97,4527.56 2114.23,4527.56 2128.1,4513.69 2136.38,4513.69 2142.72,4520.03 2165.7,4520.03 v1(2168.31,4522.64)
NetQ6_4: Q6.4 U5.15 | length 281.8
  Top Layer w10: Q6.4@4063.39,2551.18 4066.29,2554.09 4066.29,2587.94 v1(4068.9,2590.55) ; v1(4230.31,2610.24) 4231.81,2611.73 4231.81,2654.23 U5.15@4233.31,2655.72
  Bottom Layer w10: v1(4068.9,2590.55) 4071.06,2588.38 4084.65,2588.38 4111.29,2561.74 4181.82,2561.74 v1(4230.31,2610.24)
NetR1_2: R1.2 U1.4 | length 129.3
  Top Layer w10: R1.2@2222.44,3447.83 2222.44,3425.54 2234.25,3413.73 v1(2234.25,3413.39) ; v1(2242.13,3374.02) 2242.61,3373.53 2242.61,3327.63 U1.4@2243.1,3327.14
  Bottom Layer w10: v1(2234.25,3413.39) 2234.25,3409.7 2242.13,3401.83 v1(2242.13,3374.02)
NetR2_2: R2.2 R3.2 U1.2 | length 222.4
  Top Layer w10: U1.2@2294.28,3327.14 2298.14,3331 2298.14,3358.75 2306.33,3366.94 2306.33,3371.4 v1(2308.93,3374.01) ; v1(2348.68,3381.89) 2386.83,3381.89 R2.2@2396.72,3372 2398.64,3370.08 R3.2@2466.54,3370.08
  Bottom Layer w10: v1(2308.93,3374.01) 2340.79,3374.01 v1(2348.68,3381.89) v1@2348.68,3385.58
NetR4_1: R4.1 U1.3 | length 121.7
  Top Layer w10: U1.3@2268.69,3327.14 2272.55,3331 2272.55,3364.39 2277.43,3369.26 v1(2277.43,3372.95) ; v1(2285.43,3409.45) 2285.43,3413.13 2292.94,3420.65 2292.94,3432.79 2297.16,3437.01 R4.1@2297.24,3437.01
  Bottom Layer w10: v1(2277.43,3372.95) 2279.43,3374.95 2279.43,3399.76 2285.43,3405.76 v1(2285.43,3409.45)
NetR9_1: R9.1 servo.1 servo_F.2 | length 1633.9
  Top Layer w10: servo.1@2305.72,785 2383.86,706.86 2383.86,483.27 2316.93,416.34 R9.1@2316.93,257.06
  Bottom Layer w145.67: servo.1@2310.04,759.84 2520.67,759.84 2728.35,967.52 2800.35,967.52 servo_F.2@3037.72,1204.89 ; servo_F.2@3037.72,1218 servo_F.2@3171.57,1218
NetR9_2: R9.2 R11.1 U12.3 | length 217
  Top Layer w10: R11.1@2391.13,133.86 2381.66,143.33 2381.66,156.06 2336.1,201.61 2327.92,201.61 2326.56,202.97 2326.56,209.27 2327.92,210.63 U12.3@2436.02,210.63
NetR12_2: R12.2 R13.2 U2.2 | length 214
  Top Layer w10: U2.2@3082.72,3134 3082.72,3152.7 3090.45,3160.43 3090.45,3164.15 3116.36,3190.06 3147.54,3190.06 3165.15,3172.45 3211.41,3172.45 3216.54,3167.32 R13.2@3216.54,3201.77
NetR14_1: R14.1 U2.3 | length 171.6
  Top Layer w10: U2.3@3057.13,3134 3060.98,3137.86 3060.98,3174.17 3100.39,3213.58 3120.09,3213.58 3139.76,3233.26 R14.1@3139.76,3259.84
NetR16_2: R16.2 U2.4 | length 138
  Top Layer w10: U2.4@3031.54,3134 3035.39,3137.86 3035.39,3186.97 3072.83,3224.41 R16.2@3072.83,3254.92
NetR20_2: R20.2 R21.1 U8.3 | length 191.1
  Top Layer w10: R21.1@3015.75,234.25 3013.78,234.25 3003.03,245 3003.03,246.97 3001.97,248.03 R20.2@3001.97,325.72 3003.48,327.23 3091.99,327.23 U8.3@3093.5,328.74
NetR22_2: R22.2 R23.2 U3.2@5071.96,2999.43 | length 209.4
  Top Layer w10: U3.2@5071.96,2999.43 5073.62,3001.1 5073.62,3034.25 5109.95,3070.58 R22.2@5139.95,3070.58 ; R22.2@5136.61,3064 5150.32,3050.3 5150.32,3030.68 5161,3020 5161,3019.26 5166.86,3013.4 5168.98,3013.4 5182.68,2999.7 R23.2@5182.68,2991.82
NetR24_1: R24.1 U3.3@5046.37,2999.43 | length 140.8
  Top Layer w10: v1(5045.28,3088.58) 5045.28,3092.27 5057.09,3104.08 R24.1@5057.09,3132.56 ; U3.3@5046.37,2999.43 5047.79,3000.85 5047.79,3049.76 v1(5049.21,3051.18)
  Bottom Layer w10: v1(5045.28,3088.58) 5047.24,3086.61 5047.24,3053.15 v1(5049.21,3051.18)
NetR26_2: R26.2 U3.4@5020.77,2999.43 | length 136.9
  Top Layer w10: R26.2@4994.09,3128.94 4994.09,3101.6 5017.72,3077.98 5017.72,3054.87 ; 5017.72,3051.18 5019.25,3049.65 5019.25,3000.96 U3.4@5020.77,2999.43
NetR40_2: R40.2 R41.1 U5.3@4537.4,267.72 | length 214
  Top Layer w10: R40.2@4446.85,284.38 4449.87,284.38 4457.84,276.41 4457.84,273.39 4463.52,267.72 U5.3@4537.4,267.72 ; R40.2@4458.66,283.46 4458.66,267.72 4458.66,194.88 4463.66,189.88 4463.66,187.91 4474.41,177.17 R41.1@4476.38,177.17
NetR42_2: R42.2 R43.2 U4.2 | length 290.5
  Top Layer w10: U4.2@3701.31,2957.28 3701.31,2975.98 3709.04,2983.72 3709.04,2987.43 3732.31,3010.7 3796.13,3010.7 3819.96,3034.53 3826.85,3034.53 3841.26,3048.94 R42.2@3841.26,3055.82 ; R42.2@3850.39,3048.23 3860.24,3048.23 3873.94,3061.93 3873.94,3071.77 3874.02,3071.85 R43.2@3874.02,3125.24
NetR44_1: R44.1 U4.3 | length 127.2
  Top Layer w10: U4.3@3675.72,2957.28 3679.57,2961.14 3679.57,2992.82 3711.03,3024.27 3711.03,3037.25 3717.52,3043.74 R44.1@3717.52,3067.18
NetR46_2: R46.2 U4.4 | length 139.6
  Top Layer w10: R46.2@3624.02,3077.76 3650.59,3051.18 v1(3651.57,3051.18) ; U4.4@3650.13,2957.28 3650.13,2995.14 3659.45,3004.46 v1(3659.45,3007.87)
  Bottom Layer w10: v1(3651.57,3051.18) 3651.57,3047.49 3659.45,3039.62 v1(3659.45,3007.87)
NetR50_1: R50.1 SW2.1 | length 139.5
  Top Layer w6: R50.1@3294.56,4900 3294.56,4786.54 3309.24,4771.85 SW2.1@3314.56,4771.85
NetR51_1: R51.1 R52.2 U9.3@3615.16,320.87 | length 204.4
  Top Layer w10: R51.1@3557.09,212.6 3554.07,212.6 3546.1,220.57 3546.1,223.59 3528.54,241.14 R52.2@3528.54,313.91 3532.02,317.39 3611.68,317.39 U9.3@3615.16,320.87
NetR53_2: R53.2 R54.2 U5.2@4335.67,2888.01 | length 244.7
  Top Layer w10: U5.2@4335.67,2888.01 4335.67,2906.71 4343.4,2914.44 4343.4,2918.15 4362.26,2937.01 4437.39,2937.01 R53.2@4445.24,2929.16 4445.24,2962.52 4474.84,2992.13 R54.2@4498.03,2992.13
NetR55_1: R55.1 U5.3@4310.08,2888.01 | length 177.4
  Top Layer w10: U5.3@4310.08,2888.01 4313.94,2891.87 4313.94,2922.73 4334.22,2943.02 v1(4334.22,2943.89) ; v1(4395.79,2975.93) R55.1@4395.79,3003.4
  Bottom Layer w10: v1(4334.22,2943.89) 4337.86,2943.89 4346.89,2952.92 4356.3,2952.92 4378.59,2975.21 4395.07,2975.21 v1(4395.79,2975.93) ; v1@4399.22,2972.5 v1@4405.72,2979
NetR60_2: R60.2 U5.4@4284.49,2888.01 | length 148.7
  Top Layer w10: U5.4@4284.49,2888.01 4284.49,2928.19 v1(4297.24,2940.94) ; v1(4285.43,2996.06) R60.2@4285.43,3026.57
  Bottom Layer w10: v1(4285.43,2996.06) 4285.43,2992.38 4297.24,2980.57 v1(4297.24,2940.94)
NetRAS2_2: RAS2.2 RAS.2 U14.3 | length 289.2
  Top Layer w10: RAS.2@573.72,136.82 744.11,136.82 749.02,141.73 762.8,127.95 U14.3@773.62,127.95 773.62,49.21 RAS2.2@775.59,47.24
NetRAS3_2: RAS3.2 RAS4.2 U13.3 | length 259.2
  Top Layer w10: RAS3.2@1655.51,183.05 1732.26,183.05 U13.3@1759.84,210.63 ; RAS4.2@1758.86,90.71 1758.86,199.88 1763.86,204.88 1778.17,204.88 1784.82,211.54 U13.3@1784.82,215.02
NetRe7_2: Re7.2 U7.4@2582,3818.89 | length 78.1
  Top Layer w10: Re7.2@2573.72,3744.23 2573.72,3782.89 2578.14,3787.31 2578.14,3815.04 U7.4@2582,3818.89
NetRen_2: Ren.2 U6.4@2084.58,4836.37 | length 78.8
  Top Layer w10: U6.4@2084.58,4836.37 2084.58,4874.26 Ren.2@2113.51,4903.19
NetRF_LINK_1: RF.1 UA.2 | length 2284.1
  Top Layer w6: UA.2@3472.42,3799.21 3448.94,3799.21 3383.86,3734.14 3383.86,3645.67 3415.35,3614.17 v1(3525.59,3614.17)
  Layer 1 w6: v1(4147.64,3377.95) 4173.23,3403.54 v1(4628.94,3403.54)
  Bottom Layer w6: v1(3525.59,3614.17) 3525.59,3467.66 3615.3,3377.95 v1(4147.64,3377.95) ; v1(4628.94,3403.54) 4633.71,3403.54 4640.6,3396.65 5111.22,3396.65 5170.28,3455.71 RF.1@5229.33,3455.71
NetRL1_1: RL1.1 U3.3_2.1 U3.3_2.4 | length 447.3
  Top Layer w10: U3.3_2.1@4074.8,200.79 4113.43,200.79 ; U3.3_2.4@4190.94,125.98 4180.12,125.98 4142.87,163.23 4142.87,171.34 4113.43,200.79 ; RL1.1@4344.49,312.99 4344.49,282.48 4332.44,270.43 4209.65,270.43 4140.01,200.79 4113.43,200.79
NetRL2_1: RL2.1 U7.1@3660.43,194.88 U7.4@3776.57,120.08 | length 474.6
  Top Layer w10: U7.4@3776.57,120.08 3765.75,120.08 3757.95,127.87 3757.95,135.98 3699.06,194.88 U7.1@3660.43,194.88 3655.95,199.36 3655.95,216.82 3687.17,248.03 3807.34,248.03 3856.62,297.31 3856.62,302.73 3867.87,313.98 RL2.1@3911.42,313.98
NetRL3_1: RL3.1 U6.1@4625,155.51 U6.4@4741.14,80.71 | length 419.2
  Top Layer w10: U6.4@4741.14,80.71 4730.31,80.71 4663.31,147.72 4632.8,147.72 U6.1@4625,155.51 4635.83,155.51 4670.28,189.96 4736.46,189.96 4785.76,239.26 4785.76,256.47 4797.01,267.72 RL3.1@4840.55,267.72
NetRL4_1: RL4.1 U10.1 U10.4 | length 417.4
  Top Layer w10: U10.4@3293.31,135.83 3282.48,135.83 3215.47,202.83 3184.96,202.83 U10.1@3177.17,210.63 3187.99,210.63 3233.27,255.91 3242.13,255.91 3255.41,269.19 3321.36,269.19 3387.8,335.63 RL4.1@3395.67,335.63
NetRL5_1: RL5.1 U11.1 U11.4 | length 482.9
  Top Layer w10: U11.4@2657.48,59.06 2646.65,59.06 2579.65,126.06 2549.13,126.06 U11.1@2541.34,133.86 2549.13,141.65 2560.94,141.65 2631.89,212.6 RL5.1@2844.49,212.6
NetRL5_2: RL5.2 servo_L.2 | length 873.8
  Top Layer w10: RL5.2@2844.49,285.43 2844.49,324.07 2850.39,329.98 v1(2850.39,333.66) ; v1(3015.75,967.52) 3057.09,967.52 servo_L.2@3061.02,971.46
  Layer 1 w10: v1(2850.39,333.66) 2850.39,336.67 2811.89,375.18 2811.89,822.71 2965.61,976.44 3003.14,976.44 3012.06,967.52 v1(3015.75,967.52)
NetRL6_1: RL6.1 U3AS.1 U3AS.4 | length 327.1
  Top Layer w10: U3AS.1@1932.99,118.19 1963.5,118.19 ; U3AS.4@2040.31,41.38 2026.41,41.38 2020.62,47.17 2020.62,61.07 1963.5,118.19 ; RL6.1@2096.46,231.3 2088.58,231.3 1975.47,118.19 1963.5,118.19
NetRL7_1: RL7.1 U20.1 U20.4 | length 264.1
  Top Layer w10: RL7.1@1068.9,148.62 1076.44,156.16 1106.58,156.16 1133.68,183.26 1158.68,183.26 U20.1@1164.43,189.02 1203.06,189.02 1261.95,130.12 1261.95,122.01 1269.75,114.21 U20.4@1280.57,114.21
NetRL8_1: RL8.1 U17.1 U17.4 | length 291.6
  Top Layer w10: RL8.1@369.93,749.19 362.06,749.19 299.18,686.32 299.18,663.31 291.39,655.51 U17.1@282.48,655.51 321.1,655.51 380,596.61 380,588.5 387.8,580.71 U17.4@398.62,580.71
NetRL9_1: RL9.1 U15.1 U15.4 | length 325.9
  Top Layer w10: U15.1@888.78,574.8 927.4,574.8 956.85,545.35 956.85,537.24 U15.4@994.09,500 ; U15.1@899.61,574.8 1006.97,682.17 1017.8,682.17 RL9.1@1033.46,697.83
NetRM2_2: RM2.2 RM.2 U16.3 | length 646.1
  Top Layer w10: v1(419.29,948.82) 460.6,948.82 RM.2@468.48,940.94 ; v1(612.14,825.98) 612.14,706.76 649.61,669.29 728.35,669.29 711.61,652.56 RM2.2@711.61,584.65
  Bottom Layer w10: v1(419.29,948.82) 501.97,948.82 555.75,895.04 555.75,882.37 v1(612.14,825.98)
NetRM3_2: RM3.2 RM4.2 U18.3 | length 550.7
  Top Layer w10: RM4.2@115.99,647.81 115.99,713.73 85.63,744.09 U18.3@74.8,744.09 63.98,744.09 50.43,757.64 47.72,757.64 32.48,772.88 32.48,879.92 121.06,968.5 234.21,968.5 249.09,983.39 RM3.2@249.09,993.62
NetRt7_1: Rt7.1 U7.3@2556.41,3818.89 | length 96.4
  Top Layer w10: Rt7.1@2504.72,3746.72 2508.94,3750.94 2513.79,3750.94 2552.55,3789.7 2552.55,3815.04 U7.3@2556.41,3818.89
NetRt_1: Rt.1 U6.3@2110.17,4836.37 | length 116.7
  Top Layer w10: U6.3@2110.17,4836.37 2114.03,4840.22 2114.03,4862.97 2115.84,4864.78 2115.84,4867.37 2128.79,4880.31 2131.66,4880.31 2142.4,4891.05 2172.35,4891.05 2178.21,4896.91 2178.21,4899.64 2182.43,4903.85 Rt.1@2182.51,4903.85
NetRU1_2: RU1.2 RU2.2 U6.2@2135.76,4836.37 | length 459.3
  Top Layer w10: U6.2@2135.76,4836.37 2139.62,4840.22 2139.62,4865.56 2146.99,4872.93 2296.37,4872.93 2352.36,4816.93 2352.36,4741.09 2346.5,4735.24 RU1.2@2297.24,4735.24 2302.17,4730.31 RU2.2@2302.17,4681.1
NetRu7_2: Ru7.2 Ruv7.2 U7.2@2530.82,3818.89 | length 261.9
  Top Layer w10: Ru7.2@2311.44,3710.75 Ruv7.2@2379.57,3710.75 ; Ruv7.2@2390.44,3721.62 2404.14,3735.32 2418.39,3735.32 2448.01,3764.94 2471.63,3764.94 2486.22,3779.53 2513.87,3779.53 2526.96,3792.62 2526.96,3815.04 U7.2@2530.82,3818.89
NetSW2_2: SW2.2 Um1.60 | length 774.3
  Top Layer w6: SW2.2@3531.09,4673.43 3777.36,4673.43 3983.03,4467.76 4116.98,4467.76 4120.71,4471.48 Um1.60@4218.65,4471.48
PH0: RJ5.2 Um1.5 | length 544.6
  Top Layer w6: RJ5.2@3998.56,4125 4008.4,4125 4054.4,4079 4227.56,4079 4375.13,4226.57 4375.13,4313 Um1.5@4376.13,4314
PH1: C33.2 Um1.6 Y1.1 | length 731.8
  Top Layer w6: Y1.1@3866.56,3975.35 3997.2,3975.35 C33.2@4003.56,3969 4148.13,3969 4394.82,4215.69 4394.82,4313 Um1.6@4395.82,4314
RIGHT: JOYSTICK.4 Um1.21 | length 462.8
  Top Layer w6: Um1.21@4671.41,4471.48 4672.41,4470.48 4694.15,4470.48 4695.77,4468.86 4702.52,4468.86 4746.52,4424.87 4848.09,4424.87 4938.98,4515.75 4938.98,4551.18 4970.05,4582.25 5007.31,4582.25 JOYSTICK.4@5022.64,4566.93
RST: C50.2 Micro_H.5 SW3.3 SW3.4 Um1.7 Usup.2 | length 2409.3
  Top Layer w6: SW3.4@4173.23,3627.95 SW3.4@4187.01,3627.95 ; Um1.7@4415.5,4314 4415.5,4197 4246.06,4027.56 4246.06,3913 ; Usup.2@4422.41,3773.62 4412.41,3773.62 4405.41,3766.62 4405.41,3765.7 4399.55,3759.84 4251.92,3759.84 4246.06,3765.7 ; C50.2@4608.27,3620.08 4600.39,3627.95 SW3.3@4531.5,3627.95 SW3.4@4187.01,3627.95 ; Micro_H.5@5151.72,4016 5151.72,3918.68 5146.04,3913 4246.06,3913 ; SW3.4@4187.01,3627.95 4209.57,3650.51 4209.57,3729.2 4246.06,3765.7 ; 4246.06,3765.7 4246.06,3913
Servo_Fuse: R30.1 U11.3 U12.1 U12.4 Um1.8 | length 5716.9
  Top Layer w6: v1(4306.79,3990.45) 4309.21,3990.45 4365.09,4046.33 R30.1@4368.11,4046.33 4371.13,4046.33 4379.1,4054.29 4379.1,4093.66 4435.19,4149.76 Um1.8@4435.19,4314
  Top Layer w10: U12.1@2436.02,285.43 2436.02,319.88 2478.35,362.2 ; U11.3@2541.34,59.06 2530.51,59.06 2516.97,72.6 2514.26,72.6 2486.22,100.64 2486.22,155.51 U12.4@2541.34,210.63 ; U12.4@2552.17,210.63 U12.4@2541.34,210.63 ; v1(3293.31,1488.19) 2954.72,1488.19 2913.39,1446.85 2913.39,1003.94 2692.9,783.45 ccw(c2722.44,728.35) 2667.34,757.89 2525.59,616.14 2525.59,409.45 2478.35,362.2 ; v1(3958.66,3348.5) 3962.35,3348.5 3979.1,3365.25 3981.39,3365.25 3994.09,3377.95 v1(3994.09,3417.32) ; 2478.35,362.2 2478.35,333.92 2474.33,329.9 2474.33,277.64 U12.4@2541.34,210.63
  Bottom Layer w6: v1(3994.09,3417.32) 3994.09,3645.67 4306.79,3958.37 v1(4306.79,3990.45)
  Bottom Layer w10: v1(3293.31,1488.19) 3293.31,1546.66 3568.03,1821.38 3927.06,1821.38 3946.85,1841.18 3946.85,2565.94 3891.73,2621.06 3891.73,3271.9 3941,3321.17 3941,3328.25 3958.66,3345.9 v1(3958.66,3348.5)
SWCLK: Micro_H.2 Um1.49 | length 1308.9
  Top Layer w6: v3(4214.57,4740.16) 4214.57,4689.02 4215.57,4688.02 Um1.49@4218.65,4688.02 ; Micro_H.2@4851.72,4016 4905,4069.28 4932.98,4069.28 v1(4978.95,4115.25)
  Layer 1 w6: v3(4214.57,4740.16) 4214.57,4655.91 4770.16,4100.31 4960.45,4100.31 4975.39,4115.25 v1(4978.95,4115.25)
SWDIO: Micro_H.4 Um1.46 | length 1442.4
  Top Layer w6: v3(4216.75,4813.26) 4216.75,4815.7 4226.96,4825.91 4226.96,4832.68 4232.86,4838.58 4290.4,4838.58 4335.76,4793.22 4335.76,4767.76 Um1.46@4336.76,4766.76 ; v1(5037.72,4175) 5037.72,4173.77 5053.94,4157.55 5053.94,4018.22 Micro_H.4@5051.72,4016
  Layer 1 w6: v3(4216.75,4813.26) 4216.75,4796.44 4736.05,4277.15 4935.57,4277.15 v1(5037.72,4175)
System+: CR15.1 K1.1 K2.1 MP+.1 RL.1 | length 4690
  Top Layer w10: K1.1@454.72,3649.61 K1.1@458.66,3653.54 ; v1(3269.68,3586.61) 3532.48,3323.82 4686.86,3323.82 4692.72,3329.68 4692.72,3725.15 RL.1@4698.82,3731.26
  Bottom Layer w10: 906.05,3472.44 1685.09,3472.44 1690.94,3478.3 1690.94,3734.3 1696.8,3740.16 2009.84,3740.16 2070.18,3679.82 2071.61,3679.82 2081,3670.43 2081,3669 2167.13,3582.87 2328.34,3582.87 2393.49,3517.72 3200.79,3517.72 v1(3269.68,3586.61)
UP: JOYSTICK.1 Um1.16 | length 436.9
  Top Layer w6: Um1.16@4592.67,4314 4956.72,4314 4973.42,4330.71 JOYSTICK.1@5022.64,4330.71
pads on no net: "ON/OFF SW.2" AS_1.3 AS_2.3 Fans.3 header.13 header.17 header.18 header.23 L1_4.3 MCM.3@2859.45,394.88 MD_1.M1 MD_1.M2 MD_2.M1 MD_2.M2 MP1.1 MP2.1 MP3.1 MP4.1 R8.1 servo.3 U9.9 U9.10 U9.11 U9.12 U9.13 U9.14 U9.15 Um1.14 Um1.15

## Polygon pours and split planes (outlines as drawn)
NetC14_1 on Top Layer "NONET_L04_P-001" (solid, pour order 51): 1828.74,2381.89 1797.24,2413.39 1797.24,3311.02 1744.26,3364 1740.94,3359.45 1005.91,3359.45 1005.91,3362.2 962.6,3401.57 962.6,3728.35 998.03,3763.78 2088.58,3763.78 2257.87,3594.49 2257.87,3397.64 2296.06,3359.45 3226.38,3359.45 3226.38,3354.33 3253.94,3326.77 3253.94,3247.05 3252.8,3247.05 3287.24,3212.6 5269.68,3212.6 5297.24,3181.1 5297.24,3169.29 5297.24,2145.67 5293.31,2145.67 5261.81,2114.17 3348.43,2114.17 3297.24,2161.42 3297.24,2350.39 3265.75,2381.89
NetAS2_F_1 on Top Layer "NETAS2_F_1_L01_P033" (solid, remove dead copper, pour order 33): 1494.09,1807.09 1509.84,1791.34 2096.46,1791.34 2104.33,1787.4 2124.02,1767.72 2124.02,1480.32 2088.58,1448.82 989.65,1448.82 950.36,1488.11 938.98,2110.24 938.98,2850.39 938.98,2854.33 970.43,2889.55 1454.71,2895.29 1454.72,2889.76 1494.09,2850.39
NetC20_1 on Top Layer "NONET_L04_P-001" (solid, pour order 38): 1962.6,2984.54 1962.6,2952.76 ccw(c1978.34,2952.75) 1978.34,2937.01 2147.64,2937.01 2147.64,2590.55 ccw(c2179.13,2590.55) 2179.13,2559.06 2391.73,2559.06 ccw(c2391.73,2590.55) 2423.23,2590.55 2423.23,2932.2 2159.45,2925.2 2572.28,2936.16 ccw(c2571.41,2969.07) 2604.33,2969.07 ccw(c2570.29,2974.73) 2576.77,3008.62 1987.27,3008.62 ccw(c1986.68,2984.54)
NetC20_1 on Top Layer "NETC20_1_L01_P023" (solid, remove dead copper, pour order 23): 1958.66,3007.87 1958.66,2909.45 2328.74,2909.45 2328.74,2730.57 2564.96,2736.22 2561.5,2909.45 2375.71,2909.45 2349.71,3010.43 2310.63,3010.17
System+ on Top Layer "   " (solid, remove dead copper, pour order 14): 970.47,4858.27 970.47,4860.39 1003.78,4893.7 1003.78,5244.09 1041.72,5265.86 1661.49,5269.61 1687.01,5244.09 1687.01,5153.54 1687,3842.52 1655.51,3811.02 1647.64,3811.02 923.23,3811.02 923.23,2185.04 919.29,2185.04 852.36,2118.11 57.09,2118.11 37.4,2137.8 37.4,4838.58 57.09,4858.27
GND on Layer 2 "GND_L03_P006" (solid, remove dead copper, pour order 6): 2830.97,5125.98 2799.47,5157.48 935.04,5157.48 907.48,5182.92 907.48,5295.28 895.67,5307.09 490.73,5307.09 450.79,5263.78 450.79,4885.83 505.91,4830.71 1602.36,4830.71 1656,4775.1 1661.77,4775.1 1721,2188.85 1652.56,2114.17 71.79,2114.17 44.42,2084.92 57.38,516.29 108.27,464.57 411.42,464.57 411.42,460.63 482.28,389.76 482.28,62.99 537.4,11.81 4856.3,11.81 4883.85,39.36 4880.24,401.56 4895.65,401.56 4927.17,435.24 5230.31,435.24 5291.14,496.06 5300.26,496.06 5300.26,3220.47 5250.02,3267.7 5250.02,3273.64 3321.07,3288.96 2830.97,3782.98
DGND on Layer 2 "DGND_L03_P027" (solid, remove dead copper, pour order 27): 938.98,5279.53 966.54,5307.09 4828.78,5307.09 4879.92,5255.94 4878.54,5255.91 4878.54,4933.07 4878.54,4926.58 4911.42,4889.76 5280.23,4889.76 5280.23,4875.28 5311.56,4846.36 5306.24,3350.03 5257.87,3303.15 3427.17,3303.15 2907.48,3822.83 2907.48,5133.86 2868.11,5173.23 2864.17,5175.66 970.47,5170.75 942.91,5196.85 938.98,5196.85
System+ on Layer 2 "   " (solid, remove dead copper, pour order 48): 71.79,2118.11 40.29,2149.61 37.4,2149.61 37.4,4838.58 57.09,4858.27 970.47,4858.27 970.47,4860.39 1003.78,4893.7 1003.78,5244.09 1041.28,5266.22 1661.12,5269.98 1687.01,5244.09 1687.01,5153.54 1687,3811.02 1687,2151.07 1653.42,2118.11 1650.66,2118.11
NetAS2_F_1 on Bottom Layer "NETAS2_F_1_L04_P050" (solid, pour order 50): 1494.09,1807.09 1509.84,1791.34 2096.46,1791.34 2100.4,1791.34 2124.02,1767.72 2124.02,1496.06 2076.77,1448.82 989.65,1448.82 950.36,1488.11 938.98,2110.24 938.98,2858.1 970.43,2889.55 1454.71,2895.29 1494.09,2855.9 1494.09,2850.39
System+ on Bottom Layer "   " (solid, remove dead copper, pour order 52): 70.34,2122.05 37.4,2153.54 37.4,4830.71 68.9,4862.2 970.47,4862.2 1003.78,4895.51 1003.78,4897.64 1003.78,5248.76 1042.25,5269.96 1661.32,5273.72 1687.01,5248.03 1687.01,4677.17 1383.86,4677.17 1383.86,4464.57 1687.01,4464.57 1687.01,3759.84 1647.64,3724.41 1643.7,3724.41 966.54,3724.41 927.17,3685.04 923.23,3685.04 923.23,2157.48 887.8,2122.05
System+ on Layer 1 "   " (solid, remove dead copper, pour order 46): 970.47,4858.27 1003.78,4893.7 1003.78,5244.09 1041.28,5266.22 1661.32,5269.78 1687.01,5244.09 1687.01,5153.54 1687,3811.02 1687.01,2177.17 1627.95,2118.11 80.71,2118.11 37.4,2157.48 37.4,4838.58 57.09,4858.27
System+ on Bottom Solder "   " (solid, pour order 49): 23.03,3724.41 33.98,3346.46 393.7,3346.46 393.7,3031.5 37.4,3031.5 37.4,2174.77 894.13,2174.77 890.28,3724.41 37.4,3724.41 37.4,4464.57 354.33,4464.57 354.33,4842.52 1003.78,4842.52 1003.78,5248.76 1042.25,5269.96 1661.32,5273.72 1687.01,5248.03 1687.01,4677.17 1383.86,4677.17 1383.86,4464.57 1687.01,4464.57 1687.01,3759.84 1647.64,3724.41 1643.7,3724.41 946.85,3724.41

## Silkscreen, mask and mechanical layers (free items; w line width, h text height)
Top Overlay:
  text "RX" at 4214.66,5251.08 h40
  text "RX" at 4574.9,5250.09 h40
  text "TX" at 4304.23,5248.13 h40
  text "RX" at 3878.05,5246.16 h40
  text "TX" at 4674.31,5246.16 h40
  text "TX" at 3969.58,5245.17 h40